# Altium PCB True Variant.PcbDoc
Units mil, origin at the board's own origin, x right, y up, seen from the top; angles counter-clockwise.
Board outline 6000 x 4000 mil, 2 copper layers (Top Layer, Bottom Layer); 13 components, 12 nets, 34 pads, 2 vias.
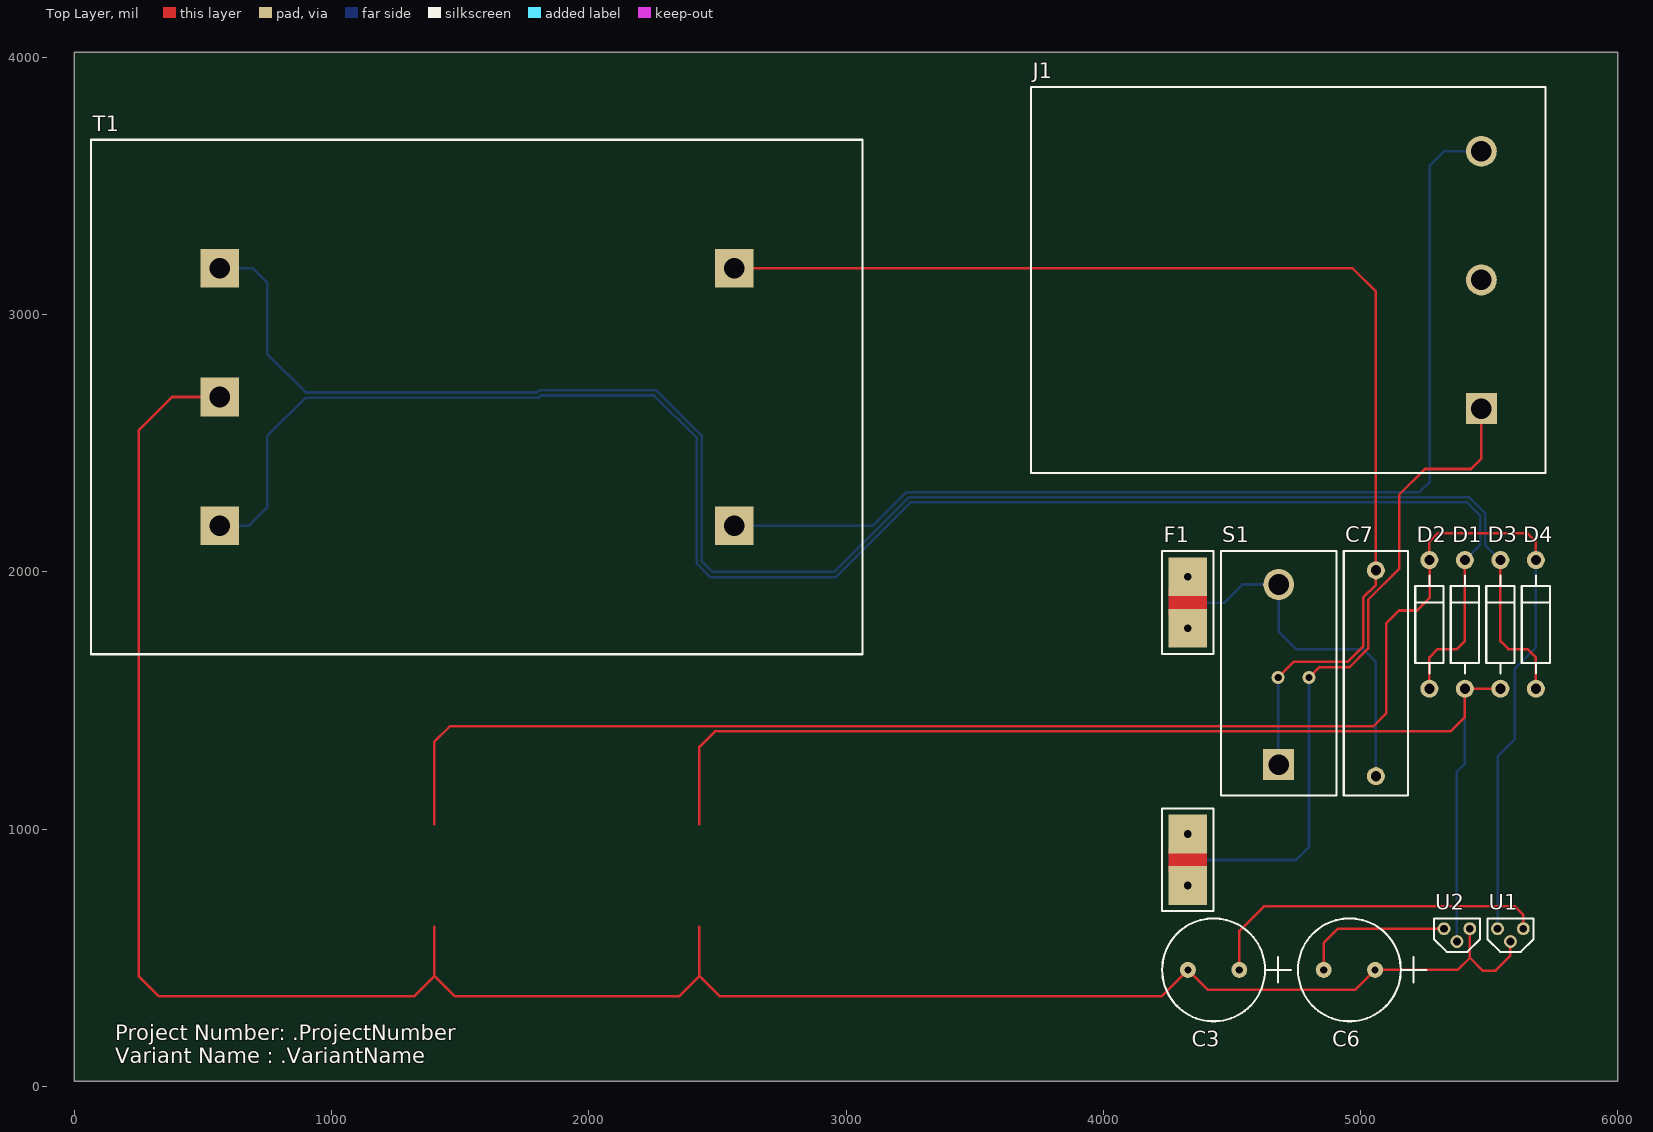
[diagram p0: Top Layer view]
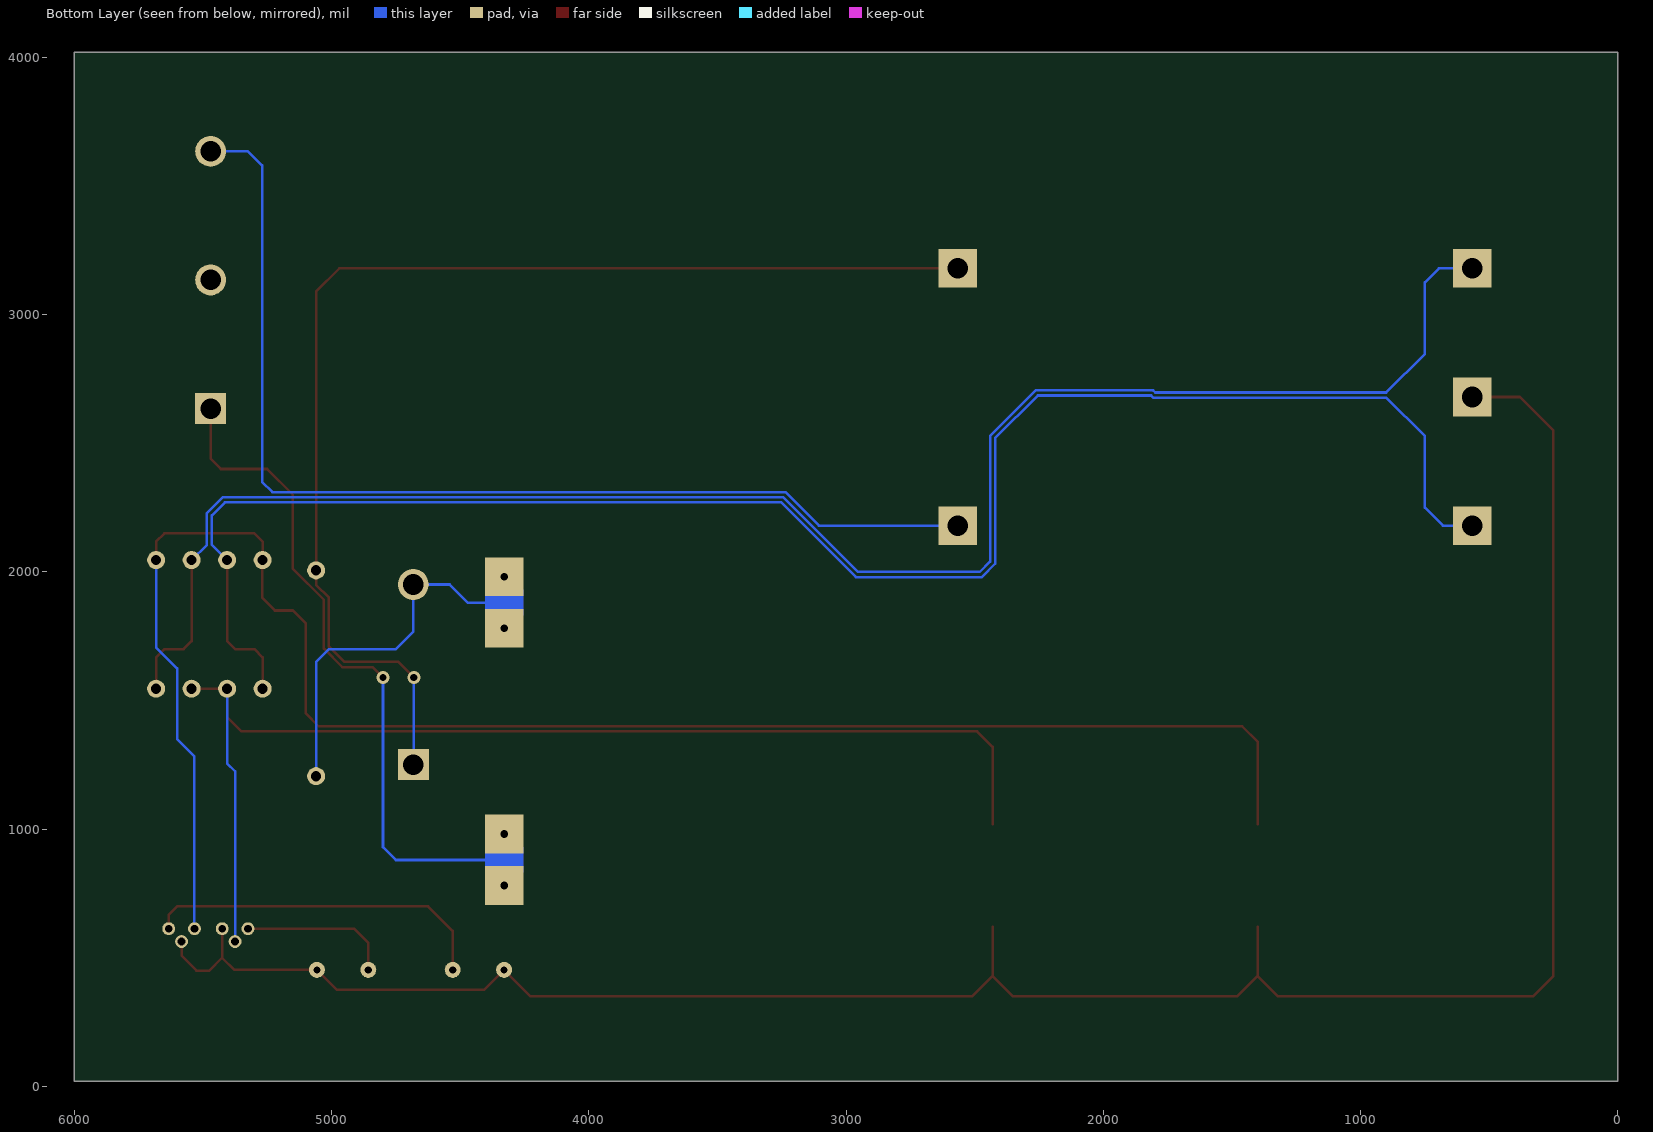
[diagram p1: Bottom Layer view, seen from below]

## Layer stack, top to bottom
Top Solder: solder mask 0.4, Solder Resist, Dk 3.5
Top Layer: signal copper 1.4
Dielectric 1: dielectric 12.6, FR-4, Dk 4.8
Bottom Layer: signal copper 1.4
Bottom Solder: solder mask 0.4, Solder Resist, Dk 3.5

## Board outline
0,20 6000,20 6000,4020 0,4020

## Design rules (kind name [scope] priority, off if disabled: settings)
Clearance [All] p1: gap=10 ignorepadtopadclearanceinfootprint=FALSE except(0: Arc-Hole Track-Hole SMDPad-Hole THPad-Hole Via-Hole Fill-Hole Poly-Hole Region-Hole Text-Hole)
PolygonConnect [All] p1: connectstyle=Relief reliefconductorwidth=10 reliefentries=4 polygonreliefangle="90 Angle" airgapwidth=10
RoutingVias [All] p1: holewidth=28 width=50 viastyle="Through Hole" minholewidth=28 minwidth=50 maxholewidth=28 maxwidth=50
SolderMaskExpansion [All] p1: expansion=4 istentingtop=FALSE
Width [All] p1: maxlimit=10 minlimit=10 preferedwidth=10
30 further rules are at their usual default settings.

## Components (designator, comment, footprint, x,y, rotation, side; value= is the part's Value field where it differs from the comment)
C3 "10uF" RB.2/.4 4529,453 r0 top
C6 "10uF" RB.2/.4 5057,453 r0 top
C7 "1nF / 2kV" RAD0.8 5060,2006 r270 top
D1 "1N4004" DIODE0.5 5406,1546 r90 top
D2 "1N4004" DIODE0.5 5268,1546 r90 top
D3 "1N4004" DIODE0.5 5544,1546 r90 top
D4 "1N4004" DIODE0.5 5682,1546 r90 top
F1 "1A" FUSE 4329,781 r90 top
J1 "CON MAINS" IEC-MAINS 5470,2635 r90 top
S1 "Power" SW-MAINS 4682,1251 r90 top
T1 "120VAC" TRANSFORMER 2565,3180 r180 top
U1 "78L15" TO-92A 5533,613 r0 top
U2 "79L15" TO-92A 5325,613 r0 top

## Footprints (in the part's own frame and the unit in brackets; to place one, negate y for a bottom-side part, rotate by r counter-clockwise, add the part's x,y. Pads: shape width x height; smd on the part's side, far side on the other; paste and mask are expansions set on the pad)
DIODE0.5 [mil]
  round 70 hole 40: 1(0,0) 2(500,0)
  silkscreen extent 60,-55 440,55
FUSE [mil]
  rect 150x150 hole 30: 1(0,0) 1(200,0) 2(1000,0) 2(1200,0)
  Top Layer region: 150,75 50,75 50,-75 150,-75
  Top Layer region: 1150,75 1050,75 1050,-75 1150,-75
  Bottom Layer region: 150,75 50,75 50,-75 150,-75
  Bottom Layer region: 1150,75 1050,75 1050,-75 1150,-75
  silkscreen extent -100,-100 1300,100
IEC-MAINS [mil]
  rect 120x120 hole 80: 1(0,0)
  round 120 hole 80: 2(500,0) 3(1000,0)
  silkscreen extent -250,-250 1250,1750
RAD0.8 [mil]
  round 70 hole 40: 1(0,0) 2(800,0)
  silkscreen extent -75,-125 875,125
RB.2/.4 [mil]
  round 62 hole 28: 1(0,0) 2(-200,0)
  silkscreen extent -300,-200 200,200
SW-MAINS [mil]
  rect 120x120 hole 80: 1(0,0)
  round 120 hole 80: 2(700,0)
  silkscreen extent -120,-225 830,225
TO-92A [mil]
  round 50 hole 30: 1(0,0) 2(50,-50) 3(100,0)
  silkscreen extent -40,-90 140,40
TRANSFORMER [mil]
  rect 150x150 hole 80: 1(0,0) 2(0,1000) 3(2000,1000) 4(2000,500) 5(2000,0)
  silkscreen extent -500,-500 2500,1500

## Part data
C3 C6: library part "CAPACITOR POL", "Bi-Polar Capacitor"
C7: library part CAP, "Capacitor"
D1 D2 D3 D4: "Diode"
F1: library part FUSE, "Fuse"
J1: "Connector"
S1: library part "SW SPST"
T1: "Center-Tapped Transformer"
U1 U2: "Very Low Drop Voltage Regulators With Inhibit"

## Via types
v1: diameter 50, hole 28, Top Layer to Bottom Layer, 2 vias

## Nets (pads, with @x,y where several pads share a name; then routed paths per layer and width w, separated by ;. In a path a pad name is that pad's centre, name@x,y a point inside that pad or via, vN(x,y) a via of type N, cw(c..) or ccw(c..) an arc to the next point about the centre after c; other vN are vias at no path point)
+15V: C3.1 U1.3 | length 1362.4
  Top Layer w10: C3.1 4529,604 4625,700 5600,700 5633,667 U1.3
-15V: C6.2 U2.1 | length 595.2
  Top Layer w10: C6.2 4857,557 4913,613 U2.1
A_FUSE: C7.2 F1.2 S1.2 | length 1435.3
  Bottom Layer w10: 4330,1880 4470,1880 4541,1951 S1.2 4682,1768 4750,1700 5010,1700 5060,1650 C7.2
A_IN: F1.1 J1.1 | length 2648
  Top Layer w10: v1(4800,1590) 4840,1630 4958.28,1630 5030,1701.72 5030,1891.72 5150,2011.72 5150,2300 5250,2400 5430,2400 5470,2440 J1.1
  Bottom Layer w10: 4330,880 4750,880 4800,930 v1(4800,1590)
A_SWITCH: C7.1 S1.1 T1.1 | length 4652.5
  Top Layer w10: T1.1 4970,3180 5060,3090 C7.1 5060,1950 5010,1900 5010,1710 4950,1650 4740,1650 v1(4680,1590)
  Bottom Layer w10: v1(4680,1590) 4680,1253 S1.1
CHASSIS: J1.2
GND: C3.2 C6.1 T1.4 U1.2 U2.3 | length 8707
  Top Layer w10: T1.4 380,2680 250,2550 250,430 330,350 1320,350 1400,430 ; 1400,620 1400,430 ; 2430,620 2430,430 ; U2.3 5425,500 ; U1.2 5583,508 5525,450 5475,450 5425,500 ; 1400,430 1480,350 2350,350 2430,430 ; 2430,430 2510,350 4226,350 C3.2 4407,375 4979,375 C6.1 5378,453 5425,500
LTAP: D1.2 D2.1 T1.3 | length 6790.9
  Top Layer w10: D2.1 5268,1668 5300,1700 5375,1700 5406,1731 D1.2
  Bottom Layer w10: T1.3 680,2180 750,2250 750,2527.5 900,2677.5 1805.78,2677.5 1814.14,2685.86 2254.14,2685.86 2420,2520 2420,2031.72 2471.72,1980 2961.57,1980 3251.57,2270 5415,2270 5465,2220 5465,2105 D1.2
NetC1_1: D2.2 D4.2 U1.1 | length 6853
  Top Layer w10: 1400,1020 1400,1340 1460,1400 5050,1400 5100,1450 5100,1800 5150,1850 5220,1850 5270,1900 5270,2044 D2.2 5268,2118 5300,2150 5650,2150 5682,2118 D4.2
  Bottom Layer w10: U1.1 5533,1283 5600,1350 5600,1625 5682,1707 D4.2
NetC4_2: D1.1 D3.1 U2.2 | length 4567.9
  Top Layer w10: 2430,1020 2430,1320 2490,1380 5350,1380 5406,1436 D1.1 D3.1
  Bottom Layer w10: U2.2 5375,1225 5406,1256 D1.1
NEUTRAL: J1.3 T1.2 | length 4228.2
  Bottom Layer w10: T1.2 3105,2180 3235,2310 5230,2310 5270,2350 5270,3580 5325,3635 J1.3
RTAP: D3.2 D4.1 T1.5 | length 6817.8
  Top Layer w10: D3.2 5544,1731 5575,1700 5650,1700 5682,1668 D4.1
  Bottom Layer w10: T1.5 695,3180 750,3125 750,2847.5 900,2697.5 1797.5,2697.5 1805.86,2705.86 2262.43,2705.86 2440,2528.28 2440,2040 2480,2000 2953.28,2000 3243.28,2290 5423.28,2290 5485,2228.28 5485,2105 D3.2

## Silkscreen, mask and mechanical layers (free items; w line width, h text height)
Top Overlay:
  text "Project Number: .ProjectNumber / Variant Name : .VariantName" at 160,90 h60